# Altium PCB Ampli_RF.PcbDoc
Units mm, origin at the board's own origin, x right, y up, seen from the top; angles counter-clockwise.
Board outline 32 x 55 mm, 2 copper layers (Top Layer, Bottom Layer); 15 components, 10 nets, 36 pads, 0 vias.
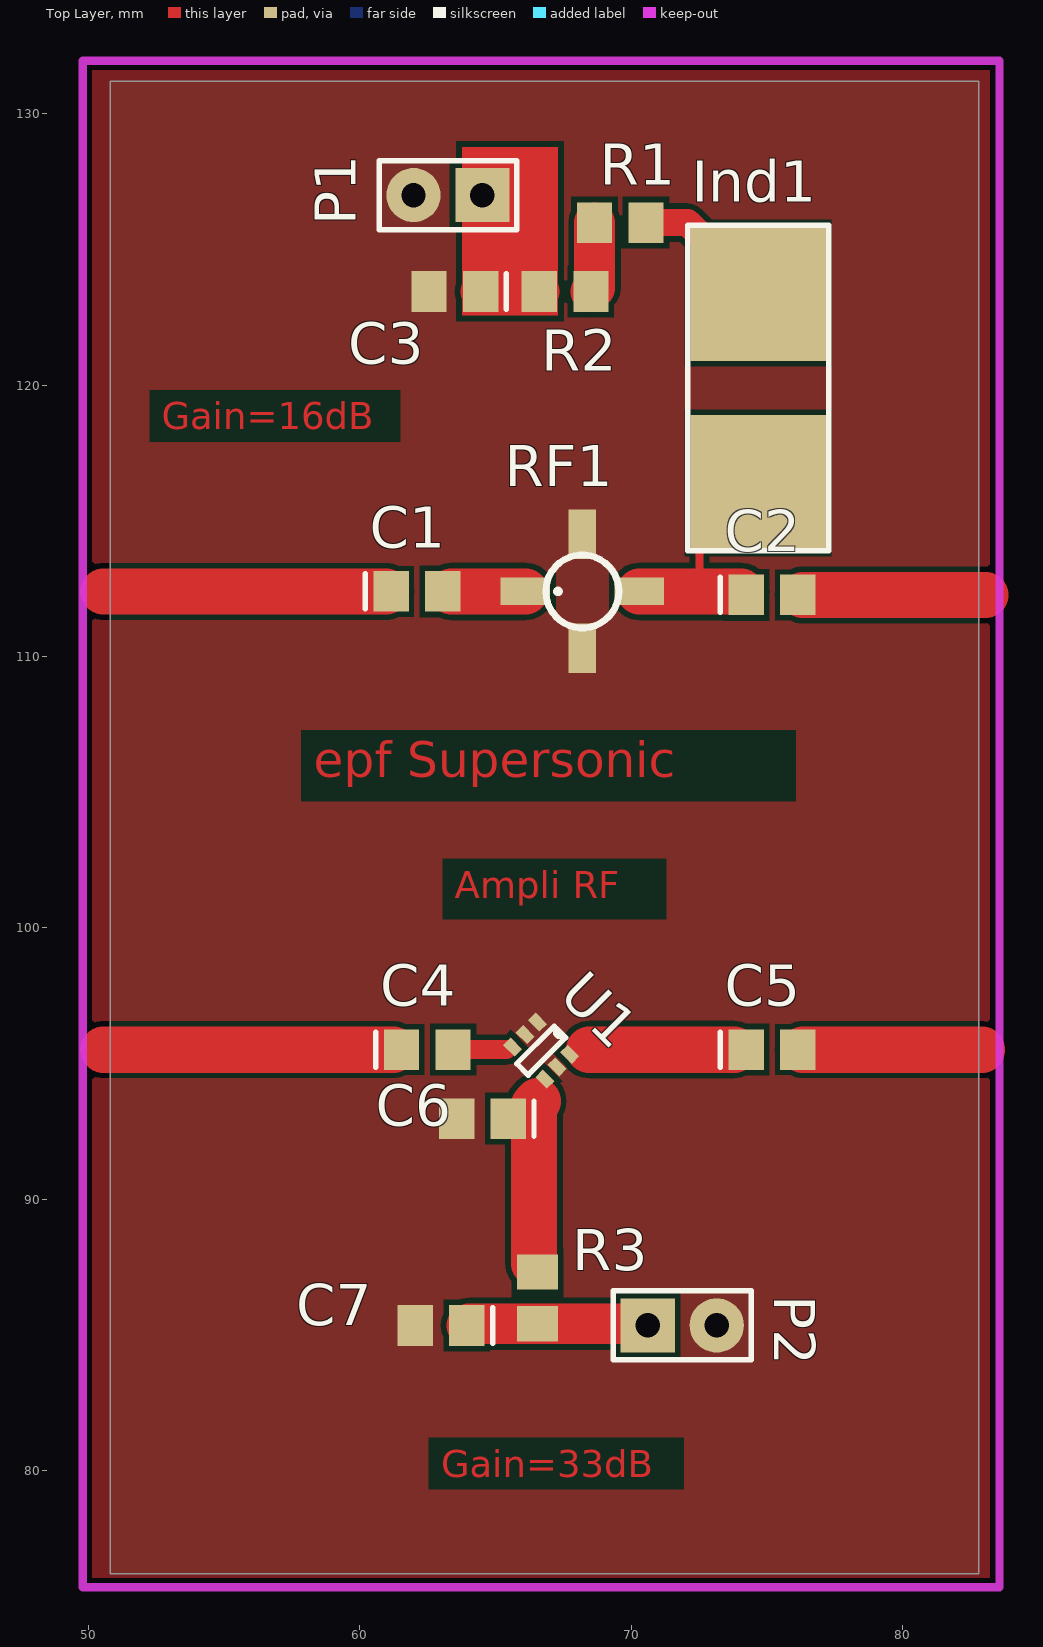
[diagram p0: Top Layer view]
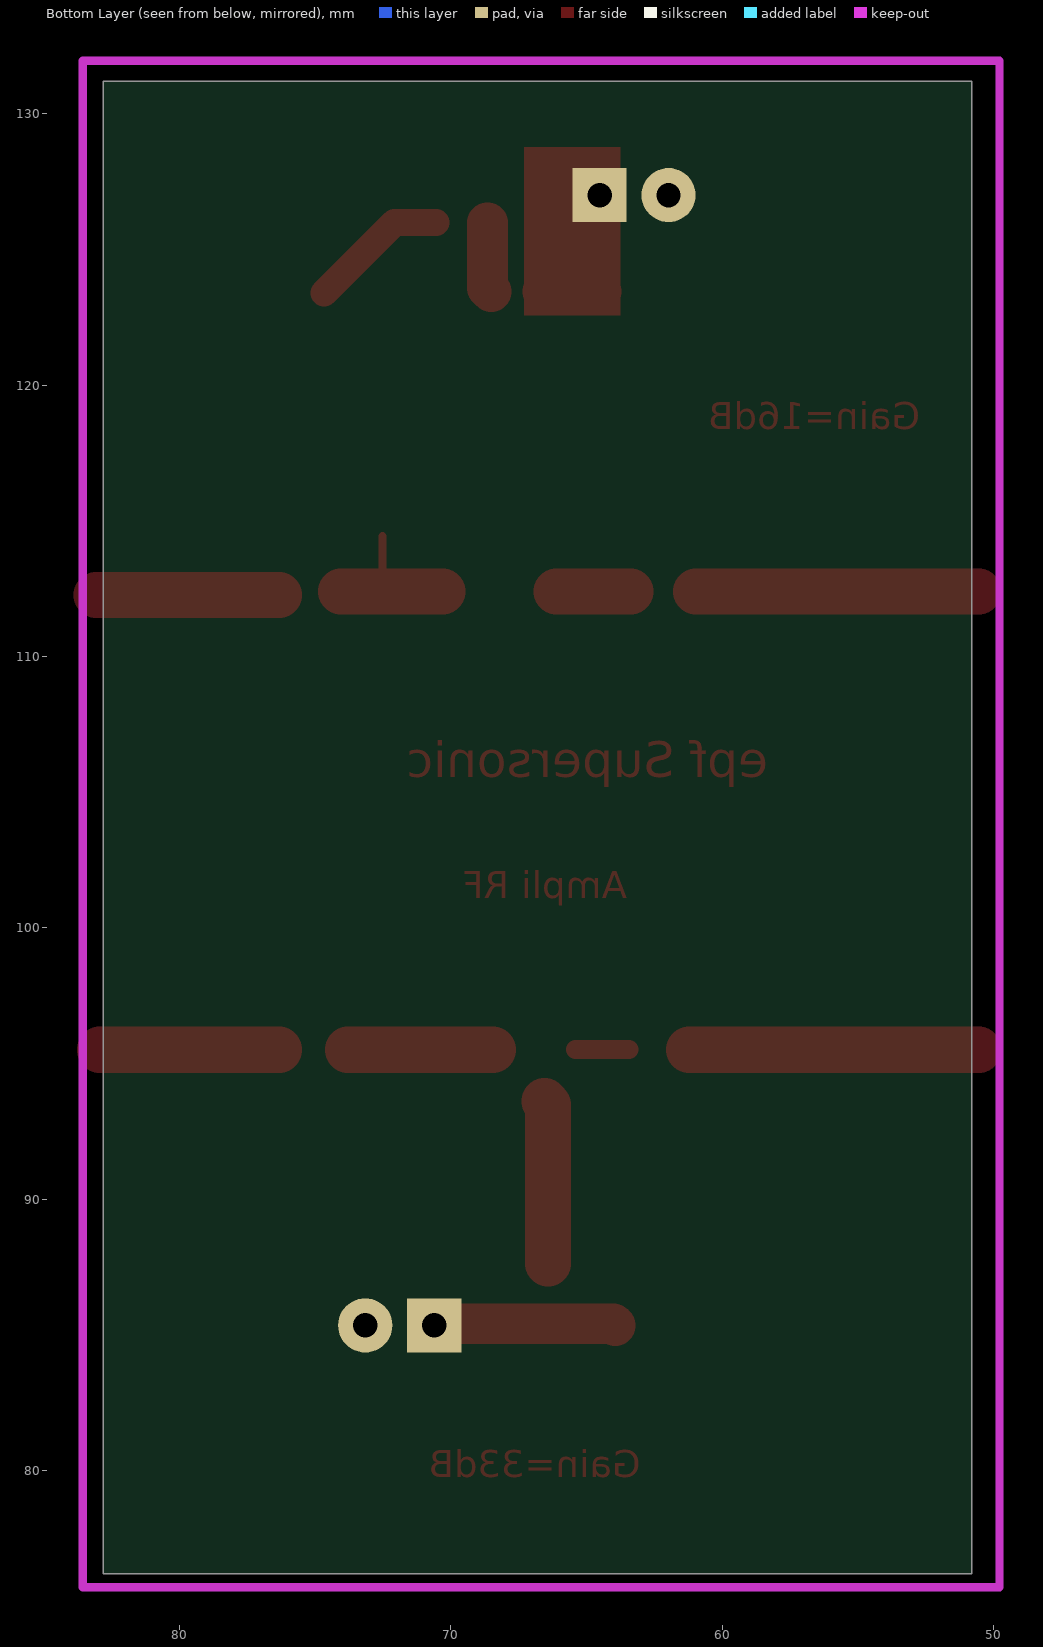
[diagram p1: Bottom Layer view, seen from below]

## Layer stack, top to bottom
Top Layer: signal copper 0.0356
Dielectric: dielectric 0.32, FR-4, Dk 4.8
Bottom Layer: signal copper 0.0356

## Board outline
50.8,76.2 82.8,76.2 82.8,131.2 50.8,131.2

## Design rules (kind name [scope] priority, off if disabled: settings)
Clearance [All] p1: gap=0.2
ComponentClearance [All] p1: gap=0.254 collisioncheckmode=3 verticalgap=0.254
HoleSize [All] p1: absolutevalues=TRUE maxlimit=2.54 minlimit=0.025 maxpercent=80.000 minpercent=20.000
PolygonConnect [All] p1: connectstyle=Direct reliefconductorwidth=0.254 reliefentries=4 polygonreliefangle="90 Angle"
RoomDefinition UPC2710TB [InComponentClass('UPC2710TB')] p1: confinementstyle=ConfineIn formatcopy=TRUE lockcomponents=FALSE outline 49.911,75.565 83.312,75.565 83.312,106.299 49.911,106.299
RoomDefinition MAR1SM [InComponentClass('MAR1SM')] p2: confinementstyle=ConfineIn formatcopy=TRUE lockcomponents=FALSE outline 49.657,106.553 83.312,106.553 83.312,132.334 49.657,132.334
RoutingLayers [All] p1: top layer_v5=TRUE bottom layer_v5=FALSE
RoutingVias [All] p1: holewidth=0.7 width=2 viastyle="Through Hole" minholewidth=0.5 minwidth=1.27 maxholewidth=2 maxwidth=3
SolderMaskExpansion [All] p1: expansion=0.102
TestPointUsage [All] p1: valid=0 allowmultiple=FALSE
Testpoint [All] p1: side=15 testpointundercomponent=TRUE minsize=1.016 maxsize=2.54 preferedsize=1.524 minholesize=0 maxholesize=1.016 preferedholesize=0.813 testpointgrid=0.025 style=1023 order=0-112345678
Width [All] p1: maxlimit=4 minlimit=0.2 preferedwidth=1.7
16 further rules are at their usual default settings.

## Classes and differential pairs
component class UPC2710TB: C4 C5 C6 C7 Ind2 P2 R3 U1
component class MAR1SM: C1 C2 C3 Ind1 P1 R1 R2 RF1

## Components (designator, comment, footprint, x,y, rotation, side; value= is the part's Value field where it differs from the comment)
C1 "Cap Pol3" C0805 62.103,112.395 r0 top
C2 "Cap Pol3" C0805 75.184,112.268 r0 top
C3 "Cap Pol3" C0805 63.5,123.444 r180 top
C4 "Cap Pol3" C0805 62.484,95.504 r0 top
C5 "Cap Pol3" C0805 75.184,95.504 r0 top
C6 "Cap Pol3" C0805 64.516,92.964 r180 top
C7 "Cap Pol3" C0805 62.992,85.344 r180 top
Ind1 "Ind2" IND_7MM 74.676,119.888 r90 top
P1 "Header 2" HDR1X2 64.516,127 r180 top
P2 "Header 2" HDR1X2 70.612,85.344 r0 top
R1 "Res Semi" 2012[0805] 69.596,125.984 r180 top
R2 "Res Semi" 2012[0805] 67.564,123.444 r180 top
R3 "Res Semi" 2012[0805] 66.548,86.36 r90 top
RF1 "*" MAR-1 68.199,112.395 r0 top
U1 "uPC2710TB" UPC2710TB2 66.548,96.52 r315 top

## Footprints (in the part's own frame and the unit in brackets; to place one, negate y for a bottom-side part, rotate by r counter-clockwise, add the part's x,y. Pads: shape width x height; smd on the part's side, far side on the other; paste and mask are expansions set on the pad)
2012[0805] [mm] "Chip Resistor; Body 2.0 x 1.3 mm (LxW typ)"
  rect 1.3x1.5 smd: 1(-0.95,0) 2(0.95,0)
C0805 [mm] "Chip Capacitor; Body 2.0 x 1.2 mm (LxW typ)"
  rect 1.3x1.5 smd: 1(-0.95,0) 2(0.95,0)
  silkscreen extent -1.9,-0.65 -1.9,0.65
HDR1X2 [mm] "Connector; Header; 2 Position"
  rect 2x2 hole 0.9: 1(0,0)
  round 2 hole 0.9: 2(2.54,0)
  silkscreen extent -1.27,-1.27 3.81,1.27
IND_7MM [mm]
  rect 5x5 smd: 1(-3.5,0) 2(3.5,0)
  silkscreen extent -6,-2.6 6,2.6
MAR-1 [mm]
  rect 1.83x1.02 smd: 1(-2.1,0) 3(2.1,0)
  rect 1.02x1.83 smd: 2(0,-2.1) 4(0,2.1)
  silkscreen extent -1.35,-1.34 1.35,1.34
UPC2710TB2 [mm]
  rect 0.6x0.4 smd: 1(0,-1.3) 2(0,-0.65) 3(0,0) 4(1.675,0) 5(1.675,-0.65) 6(1.675,-1.3)
  silkscreen extent 0.54,-1.63 1.13,0.33

## Part data
C1 C2 C3 C4 C5 C6 C7: "Polarized Capacitor (Surface Mount)"
P1 P2: "Header, 2-Pin"
R1 R2 R3: "Semiconductor Resistor"
RF1: library part MAR-1SM

## Nets (pads, with @x,y where several pads share a name; then routed paths per layer and width w, separated by ;. In a path a pad name is that pad's centre, name@x,y a point inside that pad or via, vN(x,y) a via of type N, cw(c..) or ccw(c..) an arc to the next point about the centre after c; other vN are vias at no path point)
5V: C7.1 P2.1 R3.1 | length 6.7
  Top Layer w1.5: C7.1 64.008,85.41 P2.1@70.546,85.41
  Top Layer w1.7: P2.1@70.546,85.41 P2.1
GND: C3.2 C6.2 C7.2 P1.2 P2.2 RF1.2 RF1.4 U1.2 U1.3 U1.5
NetC1_2: C1.2 RF1.1 | length 2.7
  Top Layer w1.7: C1.2@63.373,112.395 RF1.1
NetC2_1: C2.1 Ind1.1 RF1.3 | length 5.8
  Top Layer w0.3: 72.517,112.395 Ind1.1@72.517,114.427
  Top Layer w1.7: RF1.3 C2.1@74.041,112.395
NetC4_2: C4.2 U1.1 | length 2
  Top Layer w0.7: C4.2 65.405,95.504
NetC5_1: C5.1 U1.4 | length 5.3
  Top Layer w1.7: 68.453,95.504 C5.1@73.787,95.504
NetC6_1: C6.1 R3.2 U1.6 | length 6
  Top Layer w1.7: R3.2@66.421,87.63 66.421,93.472 66.553,93.604
NetInd1_2: Ind1.2 R1.1 | length 5.2
  Top Layer w1: R1.1 72.08,125.984 Ind1.2
NetR1_2: R1.2 R2.1 | length 2.6
  Top Layer w1.5: R2.1 68.646,123.576 R1.2
VCC: C3.1 P1.1 R2.2 | length 2.2
  Top Layer w1.5: C3.1 R2.2
pads on no net: C1.1 C2.2 C4.1 C5.2
copper on no net: | length 34.4
  Top Layer w1.7: 50.546,95.504 61.214,95.504 ; 50.546,112.395 60.96,112.395 ; 76.327,95.504 82.931,95.504 ; 76.327,112.268 83.058,112.268

## Polygon pours and split planes (outlines as drawn)
GND on Top Layer (solid, remove dead copper): 48.387,134.239 48.387,73.025 89.027,73.025 89.027,136.271

## Keep-outs
Keep-Out Layer:
  lines w0.3: 49.784,75.692 83.566,75.692 83.566,131.953 49.784,131.953 49.784,75.692

## Other copper
Top Layer:
  rectangle net VCC: 63.754,122.555 67.31,128.778
  text "Gain=16dB" at 52.705,118.364 h1
  text "epf Supersonic" at 58.293,105.537 h1.3
  text "Ampli RF" at 63.5,101.092 h1
  text "Gain=33dB" at 62.992,79.756 h1

## Silkscreen, mask and mechanical layers (free items; w line width, h text height)
Drill Drawing:
  text "Drill Drawing." at 87.88,78.74 h1.52

## Dimensions
49.784,75.692 to 83.566,75.692 on Mechanical 1
49.784,75.692 to 49.784,131.953 on Mechanical 1